# Altium PCB PCB1.PcbDoc
Units mm, origin at the board's own origin, x right, y up, seen from the top; angles counter-clockwise.
Board outline 55 x 30 mm, 2 copper layers (Top Layer, Bottom Layer); 21 components, 18 nets, 54 pads, 4 vias.
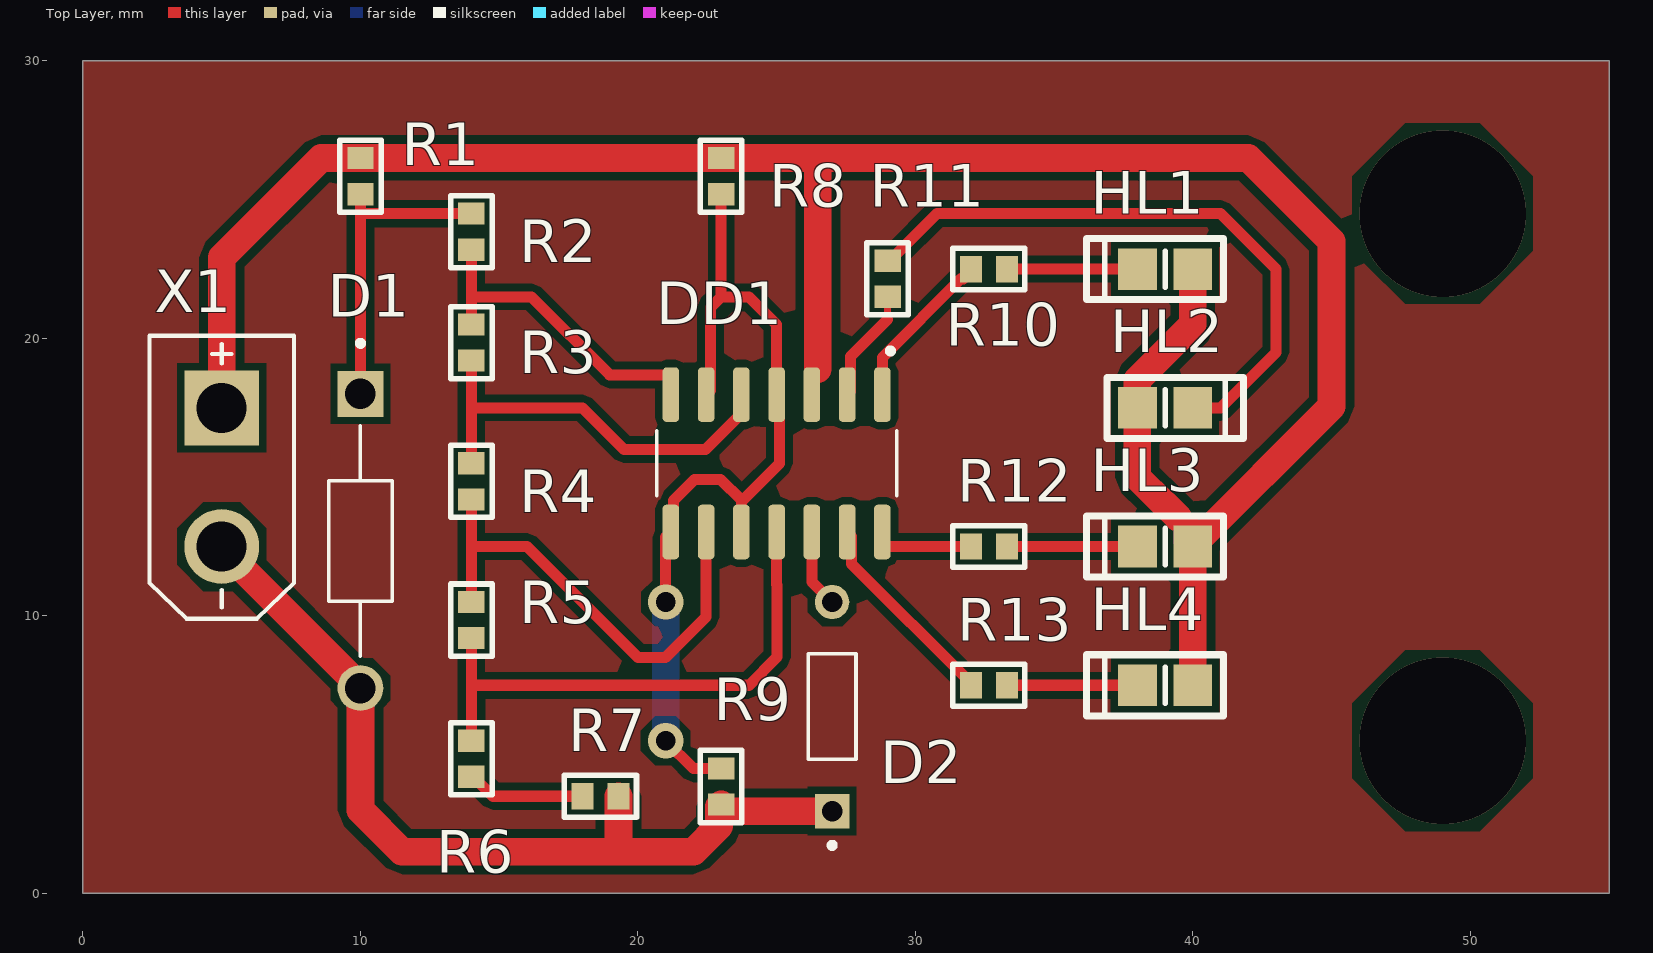
[diagram p0: Top Layer view]
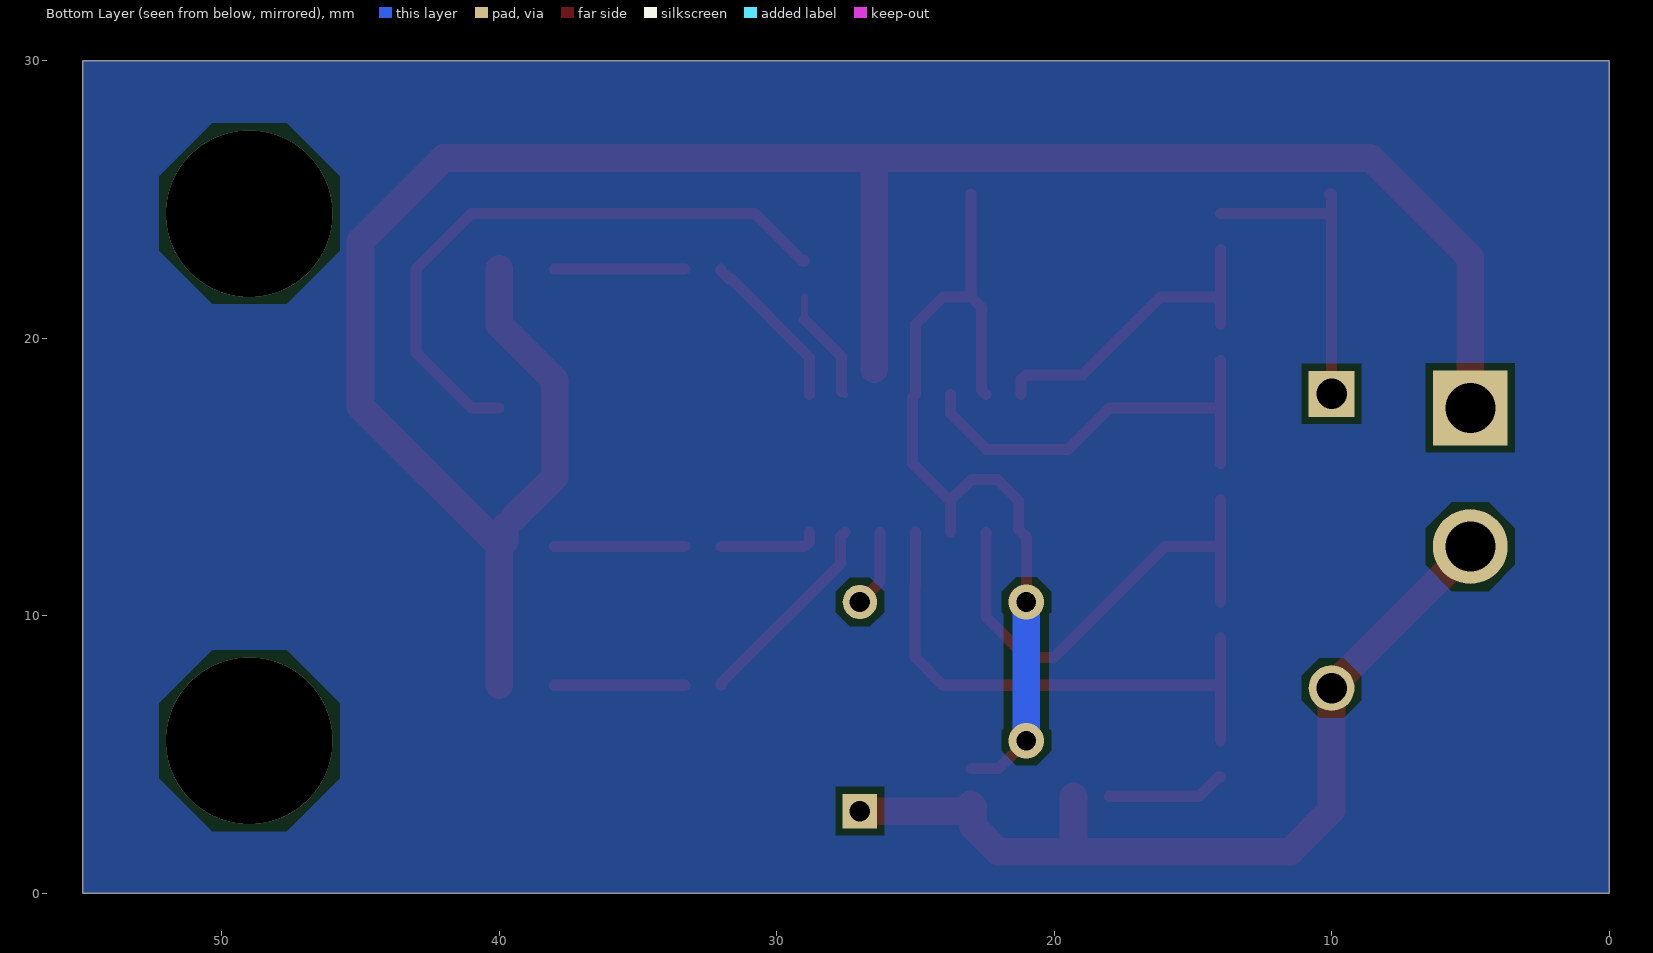
[diagram p1: Bottom Layer view, seen from below]
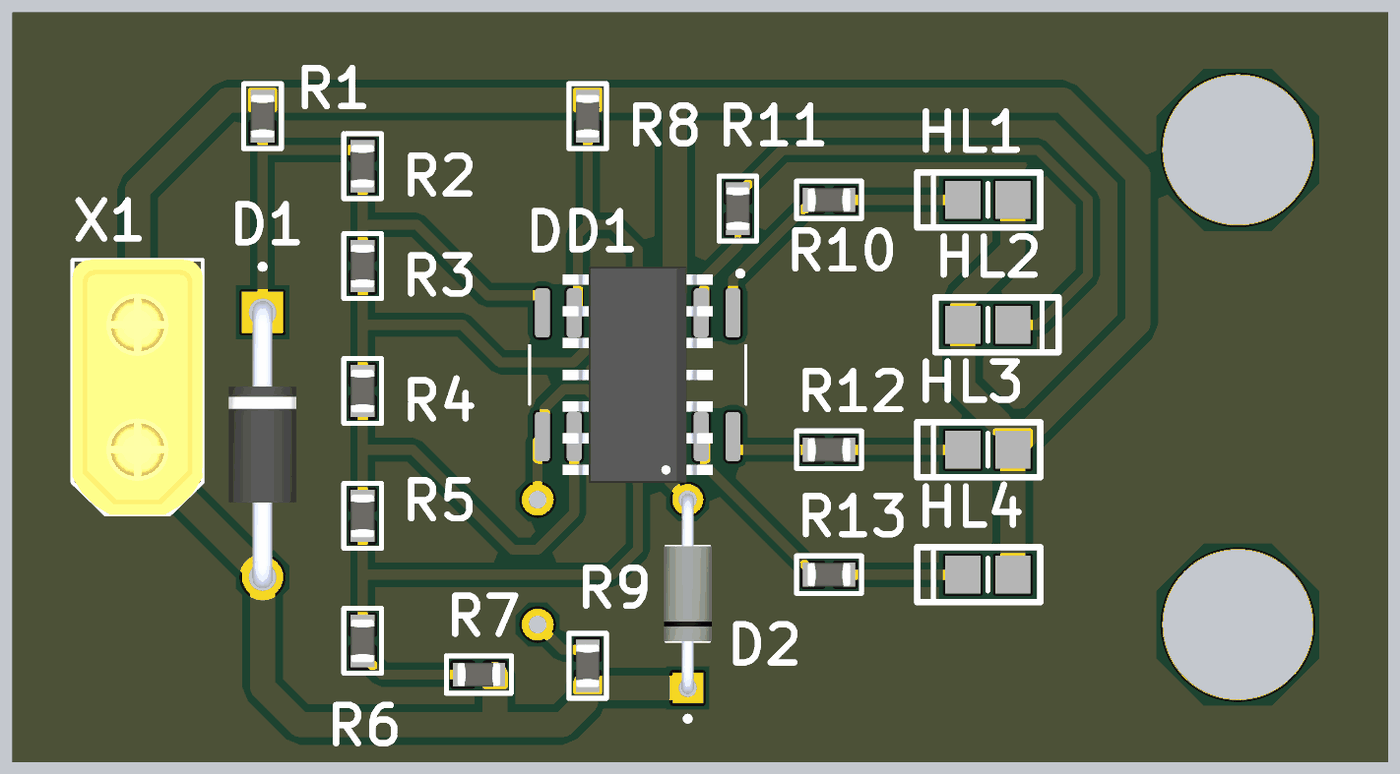
[diagram p2: 3D render of the assembled board from above, using the file's embedded part models]

## Layer stack, top to bottom
Top Solder: solder mask 0.0102, Solder Resist, Dk 3.5
Top Layer: signal copper 0.0356
Dielectric 1: dielectric 0.32, FR-4, Dk 4.8
Bottom Layer: signal copper 0.0356
Bottom Solder: solder mask 0.0102, Solder Resist, Dk 3.5

## Board outline
0,0 0,30 55,30 55,0

## Design rules (kind name [scope] priority, off if disabled: settings)
Clearance [All] p1: gap=0.254 ignorepadtopadclearanceinfootprint=FALSE except(0: Arc-Hole Track-Hole SMDPad-Hole THPad-Hole Via-Hole Fill-Hole Poly-Hole Region-Hole Text-Hole)
PolygonConnect [All] p1: connectstyle=Relief reliefconductorwidth=0.254 reliefentries=4 polygonreliefangle="90 Angle" airgapwidth=0.254
RoutingVias [All] p1: holewidth=0.711 width=1.27 viastyle="Through Hole" minholewidth=0.711 minwidth=1.27 maxholewidth=0.711 maxwidth=1.27
SolderMaskExpansion [All] p1: expansion=0.102 istentingtop=FALSE
Width [All] p1: maxlimit=1 minlimit=0.2 preferedwidth=0.4
30 further rules are at their usual default settings.

## Components (designator, comment, footprint, x,y, rotation, side; value= is the part's Value field where it differs from the comment)
D1 "1N4740A" DIOAD1060W70L435D230 10,12.7 r270 top value="10 В"
D2 "1N4148" DIOAD753W49L380D172B 27,6.732 r90 top
DD1 "LM339D" SOIC127P600X175-14N 25,15.5 r270 top
HL1 "LED" 0805D 39.1,22.4 r180 top
HL2 "LED" 0805D 38.9,17.6 r0 top
HL3 "LED" 0805D 39.1,12.4 r180 top
HL4 "LED" 0805D 39.1,7.4 r180 top
R1 "Resistor" 0603R 10,25.85 r90 top value=560
R2 "Resistor" 0603R 14,23.85 r90 top value="22 к"
R3 "Resistor" 0603R 14,19.85 r90 top value="3,0 к"
R4 "Resistor" 0603R 14,14.85 r90 top value="3,0 к"
R5 "Resistor" 0603R 14,9.85 r90 top value="3,0 к"
R6 "Resistor" 0603R 14,4.85 r90 top value="68 к"
R7 "Resistor" 0603R 18.65,3.5 r180 top value="1,0 к"
R8 "Resistor" 0603R 23,25.85 r90 top value="10 к"
R9 "Resistor" 0603R 23,3.85 r90 top value="11 к"
R10 "Resistor" 0603R 32.65,22.5 r0 top value=430
R11 "Resistor" 0603R 29,22.15 r90 top value=430
R12 "Resistor" 0603R 32.65,12.5 r0 top value=430
R13 "Resistor" 0603R 32.65,7.5 r0 top value=430
X1 "XT30UPB-M" XT30UPB-M 5,15 r270 top

## Footprints (in the part's own frame and the unit in brackets; to place one, negate y for a bottom-side part, rotate by r counter-clockwise, add the part's x,y. Pads: shape width x height; smd on the part's side, far side on the other; paste and mask are expansions set on the pad)
0603R [mm] "Chip Resistor, 2-Leads, Body 1.60x0.85mm, IPC Medium Density"
  rect 0.8x0.95 smd: 1(-0.65,0) 2(0.65,0)
  silkscreen extent -1.3,-0.75 1.3,0.75, body extent -0.87,-0.47 0.88,0.48, height 0.9
0805D [mm]
  rect 1.4x1.5 smd: 1(-0.9,-0.1) 2(1.1,-0.1)
  silkscreen extent -2,-1.2 2.93,1, body extent -0.97,-0.8 1.17,0.6, height 0.7
DIOAD753W49L380D172B [mm]
  round 1.238 hole 0.73: A(3.768,0)
  rect 1.238x1.238 / inner round 1.238 / far side rect 1.238x1.238 hole 0.73: K(-3.768,0)
  silkscreen extent -5.1,-0.86 1.9,0.86, body extent -4,-0.95 4,0.95, height 1.91
DIOAD1060W70L435D230 [mm]
  round 1.65 hole 1.1: A(5.3,0)
  rect 1.65x1.65 / inner round 1.65 / far side rect 1.65x1.65 hole 1.1: C(-5.3,0)
  silkscreen extent -7.22,-1.15 4.16,1.15, body extent -5.74,-1.35 5.74,1.35, height 2.7
SOIC127P600X175-14N [mm]
  rrect50% 1.97x0.6 smd: 1(-2.475,3.81) 2(-2.475,2.54) 3(-2.475,1.27) 4(-2.475,0) 5(-2.475,-1.27) 6(-2.475,-2.54) 7(-2.475,-3.81) 8(2.475,-3.81) 9(2.475,-2.54) 10(2.475,-1.27) 11(2.475,0) 12(2.475,1.27) 13(2.475,2.54) 14(2.475,3.81)
  silkscreen extent -4.15,-4.33 1.17,4.33, body extent -3,-4.33 3,4.33, height 1.75
XT30UPB-M [mm]
  round 2.7 hole 1.8: N(2.5,0)
  rect 2.7x2.7 hole 1.8: P(-2.5,0)
  silkscreen extent -5.1,-2.6 5.1,2.6, body extent -5.1,-2.6 5.1,2.6, height 10.7

## Part data
D1: "диод Зенера 10 В", Current nominal (mA)=25, Package="DO-41 Vishay Semiconductor", Power (W)=1, Voltage nominal (V)=10, Accuracy=0,05, Check_prices=https://www.snapeda.com/parts/1N4740A-TR/Vishay/view-part/?ref=eda, MF="Vishay Semiconductor", MP=1N4740A-TR, Part Number=1N4740A, SnapEDA_Link=https://www.snapeda.com/parts/1N4740A-TR/Vishay/view-part/?ref=snap
D2: "диод", Package="AXIAL LEAD-2 ON Semiconductor", Check_prices=https://www.snapeda.com/parts/1N4148/Onsemi/view-part/?ref=eda, MF="ON Semiconductor", MP=1N4148, Part Number=1N4148, SnapEDA_Link=https://www.snapeda.com/parts/1N4148/Onsemi/view-part/?ref=snap
DD1: "4 компаратора", Package="SOIC-14 Texas Instruments", Check_prices=https://www.snapeda.com/parts/LM339D/Texas+Instruments/view-part/?ref=eda, MF="Texas Instruments", MP=LM339D, Part Number=LM339D, SnapEDA_Link=https://www.snapeda.com/parts/LM339D/Texas+Instruments/view-part/?ref=snap
HL1: "Светодиод", Color=Зеленый, Part Number=LED
HL2: "Светодиод", Color=Желтый, Part Number=LED
HL3: "Светодиод", Color=Оранжевый, Part Number=LED
HL4: "Светодиод", Color=Красный, Part Number=LED
R1: library part Resistor_560_1_0603, "Резистор номиналом 560 Ом и точностью 1%", Tolerance=1%, Part Number=Resistor_560_1_0603
R2: library part Resistor_22k_1_0603, "Резистор номиналом 22 кОм и точностью 1%", Tolerance=1%, Part Number=Resistor_22k_1_0603
R3 R4 R5: library part Resistor_3.0k_1_0603, "Резистор номиналом 3,0 кОм и точностью 1%", Tolerance=1%, Part Number=Resistor_3.0k_1_0603
R6: library part Resistor_68k_1_0603, "Резистор номиналом 68 кОм и точностью 1%", Tolerance=1%, Part Number=Resistor_68k_1_0603
R7: library part Resistor_1.0k_1_0603, "Резистор номиналом 1,0 кОм и точностью 1%", Tolerance=1%, Part Number=Resistor_1.0k_1_0603
R8: library part Resistor_10k_1_0603, "Резистор номиналом 10 кОм и точностью 1%", Tolerance=1%, Part Number=Resistor_10k_1_0603
R9: library part Resistor_11k_1_0603, "Резистор номиналом 11 кОм и точностью 1%", Tolerance=1%, Part Number=Resistor_11k_1_0603
R10 R11 R12 R13: library part Resistor_430_1_0603, "Резистор номиналом 430 Ом и точностью 1%", Tolerance=1%, Part Number=Resistor_430_1_0603
X1: "2-пиновый разъем с ключом", Value1="эта плюс", Value2="это пинус", Part Number=XT30UPB-M

## Via types
v1: diameter 6, hole 6, Top Layer to Bottom Layer, 2 vias
v2: diameter 1.27, hole 0.711, Top Layer to Bottom Layer, 2 vias

## Nets (pads, with @x,y where several pads share a name; then routed paths per layer and width w, separated by ;. In a path a pad name is that pad's centre, name@x,y a point inside that pad or via, vN(x,y) a via of type N, cw(c..) or ccw(c..) an arc to the next point about the centre after c; other vN are vias at no path point)
"14,4 ... 16,8 В": DD1.3 HL1.1 HL2.1 HL3.1 HL4.1 R1.2 R8.2 X1.P | length 84.9
  Top Layer w1: X1.P 5,22.914 8.586,26.5 R1.2 R8.2 26.486,26.5 ; DD1.3@26.486,18.903 26.486,26.5 ; 39.454,13.546 39.454,13.562 39.012,14.004 38.996,14.004 38,15 HL2.1 38,18.5 40,20.5 HL1.1 ; HL3.1@39.8,13.2 39.8,12.7 HL3.1 HL4.1 ; HL3.1@40,12.55 45,17.55 45,23.5 42,26.5 26.486,26.5
GND: D1.A D2.K R7.1 R9.1 X1.N | length 32.5
  Top Layer w1: X1.N 5,12.45 10,7.45 D1.A 10,3 11.5,1.5 19.5,1.5 ; R7.1 19.3,1.7 19.5,1.5 ; D2.K 23.237,2.963 R9.1 22.925,3.125 22.925,2.425 22,1.5 19.5,1.5
NetD1_C: D1.C R1.1 R2.2 | length 11.3
  Top Layer w0.4: D1.C 10,24.5 ; R1.1@10.075,25.2 R1.1 10,24.5 ; R2.2 10,24.5
NetD2_A: D2.A DD1.12 | length 2.8
  Top Layer w0.4: DD1.12 26.27,11.23 D2.A
NetDD1_1: DD1.1 R10.1 | length 5.9
  Top Layer w0.4: DD1.1 28.81,19.31 31.652,22.152 31.727,22.152 32,22.425 R10.1
NetDD1_2: DD1.2 R11.1 | length 4.1
  Top Layer w0.254: DD1.2 DD1.2@27.661,18.096 ; 29,20.68 R11.1
  Top Layer w0.4: DD1.2@27.661,18.096 27.661,19.341 29,20.68
NetDD1_4: DD1.4 DD1.6 DD1.8 DD1.10 R8.1 R9.2 | length 32.3
  Top Layer w0.4: v2(21,5.5) 22,4.5 R9.2 ; v2(21,10.5) 21,12.835 DD1.8 21.281,13.116 21.281,14.162 22.038,14.919 22.981,14.919 23.73,14.17 23.73,14.13 ; DD1.6 22.613,18.128 22.613,21.113 23,21.5 ; R8.1 23,21.5 ; DD1.10 23.73,14.13 ; 23,21.5 24,21.5 25,20.5 DD1.4 25.1,17.875 25.1,15.5 23.73,14.13
  Bottom Layer w1: v2(21,5.5) v2(21,10.5)
NetDD1_5: DD1.5 R3.1 R4.2 | length 15.3
  Top Layer w0.4: R4.2 14,17.5 ; R3.1 14,17.5 ; DD1.5 23.73,17.29 22.44,16 19.5,16 18,17.5 14,17.5
NetDD1_7: DD1.7 R2.1 R3.2 | length 11.7
  Top Layer w0.4: R3.2 14,21.5 ; R2.1 14,21.5 ; DD1.7 21.19,18.512 21.019,18.683 18.986,18.683 16.169,21.5 14,21.5
NetDD1_9: DD1.9 R4.1 R5.2 | length 17.5
  Top Layer w0.4: R5.2 14,12.5 ; R4.1 14,12.5 ; DD1.9 22.46,9.96 21,8.5 20,8.5 16,12.5 14,12.5
NetDD1_11: DD1.11 R5.1 R6.2 | length 19.7
  Top Layer w0.4: R6.2 14,7.5 ; R5.1 14,7.5 ; DD1.11 25,11.132 25.016,11.116 25.016,8.516 24,7.5 14,7.5
NetDD1_13: DD1.13 R13.1 | length 7.4
  Top Layer w0.4: DD1.13 27.699,12.866 27.699,11.876 32,7.575 R13.1
NetDD1_14: DD1.14 R12.1 | length 3.6
  Top Layer w0.4: DD1.14 28.81,12.671 28.981,12.5 R12.1
NetHL1_2: HL1.2 R10.2 | length 4.7
  Top Layer w0.4: R10.2 HL1.2
NetHL2_2: HL2.2 R11.2 | length 22.4
  Top Layer w0.4: R11.2 29.075,22.8 30.775,24.5 41,24.5 43,22.5 43,19.5 41,17.5 HL2.2
NetHL3_2: HL3.2 R12.2 | length 4.7
  Top Layer w0.4: R12.2 HL3.2
NetHL4_2: HL4.2 R13.2 | length 4.7
  Top Layer w0.4: R13.2 HL4.2
NetR6_1: R6.1 R7.2 | length 4.3
  Top Layer w0.4: R6.1 14.075,4.2 14.775,3.5 R7.2
copper on no net:
  other v1: 49,5.5 49,24.5

## Polygon pours and split planes (outlines as drawn)
no net on Top Layer "NONET_L01_P003" (solid, pour order 3): 0,0 0,30 55,30 55,0
no net on Bottom Layer "NONET_L02_P004" (solid, pour order 4): 0,0 0,30 55,30 55,0 43.5,0

## Silkscreen, mask and mechanical layers (free items; w line width, h text height)
Mechanical 1:
  circle w0.254: c49,24.5 r3
  circle w0.254: c49,5.5 r3